# EAGLE board 7SegmentArduino (EAGLE 9.7.0)

Size 243.65 x 59.69 mm. Coordinates in mm from the lower left corner, seen from the top.
Outline: 0,0 243.65,0 243.65,59.69 0,59.69 0,0
Copper layers (1*16): Top 0.035mm / dielectric 1.5mm / Bottom 0.035mm
Design rules "default": minimum track width 6mil, minimum drill 0.35mm, track to track 6mil, track to pad 6mil, pad to pad 6mil, via to via 6mil, smd to smd 6mil, copper to edge 40mil, drill to drill 6mil, minimum pad ring 10mil, minimum via ring 8mil, stop-mask expansion 4mil, vias tented up to drill 0mil, thermal gap 10mil

## Footprints (pad centres in the part's own frame; a part is rotated, then mirrored left to right if it is on the bottom)
7SEG-13 = drill 0.813 long: 1 -5.08,-7.62; 2 -2.54,-7.62; 3 0,-7.62; 4 2.54,-7.62; 5 5.08,-7.62; 6 5.08,7.62; 7 2.54,7.62; 8 0,7.62; 9 -2.54,7.62; 10 -5.08,7.62
RESAD1016W63L850D250B = drill 0.83 pad 1.43: 1 -5.08,0; 2 5.08,0
SWITCH-MOMENTARY-PTH-6.5MM = drill 1.016 pad 1.88: 1 -3.251,2.261; 2 3.251,2.261; 3 -3.251,-2.261; 4 3.251,-2.261
DIP762W53P254L1969H508Q16B = drill 0.743 pad 1.343: 1 -3.81,8.89; 2 -3.81,6.35; 3 -3.81,3.81; 4 -3.81,1.27; 5 -3.81,-1.27; 6 -3.81,-3.81; 7 -3.81,-6.35; 8 -3.81,-8.89; 9 3.81,-8.89; 10 3.81,-6.35; 11 3.81,-3.81; 12 3.81,-1.27; 13 3.81,1.27; 14 3.81,3.81; 15 3.81,6.35; 16 3.81,8.89
ARDUINO-UNO-R3-SHIELD = drill 1.016 pad 1.88: 3.3V 24.13,-2.54; 5V 24.13,0; A0 24.13,12.7; A1 24.13,15.24; A2 24.13,17.78; A3 24.13,20.32; A4 24.13,22.86; A5 24.13,25.4; AREF -24.13,-13.97; D2 -24.13,20.32; D3 -24.13,17.78; D4 -24.13,15.24; D5 -24.13,12.7; D6 -24.13,10.16; D7 -24.13,7.62; D8 -24.13,3.81; D9 -24.13,1.27; D10 -24.13,-1.27; D11 -24.13,-3.81; D12 -24.13,-6.35; D13 -24.13,-8.89; GND@0 24.13,2.54; GND@1 24.13,5.08; GND@2 -24.13,-11.43; IOREF 24.13,-7.62; NC 24.13,-10.16; RES 24.13,-5.08; RX -24.13,25.4; SCL -24.13,-19.05; SDA -24.13,-16.51; TX -24.13,22.86; VIN 24.13,7.62

## Placement (x,y rotation side)
DIGIT1  7SEG-CK  [7SEG-13]  234.38,31.08 0 top
R1  10k  [RESAD1016W63L850D250B]  125.16,13.3 90 top
R2  270  [RESAD1016W63L850D250B]  178.5,28.54 90 top
R3  270  [RESAD1016W63L850D250B]  181.04,28.54 90 top
R4  270  [RESAD1016W63L850D250B]  183.58,28.54 90 top
R5  270  [RESAD1016W63L850D250B]  186.12,28.54 90 top
R6  270  [RESAD1016W63L850D250B]  188.66,28.54 90 top
R7  270  [RESAD1016W63L850D250B]  191.2,28.54 90 top
R8  270  [RESAD1016W63L850D250B]  193.74,28.54 90 top
R10  10k  [RESAD1016W63L850D250B]  109.92,13.3 90 top
S1  SWITCH_MOMENTARY  [SWITCH-MOMENTARY-PTH-6.5MM]  127.7,29.81 90 top
S2  SWITCH_MOMENTARY  [SWITCH-MOMENTARY-PTH-6.5MM]  115,29.81 90 top
U1  CD4511_PDIP  [DIP762W53P254L1969H508Q16B]  159.45,29.81 90 top
U2  ARDUINO-UNO-R3-SHIELD  [ARDUINO-UNO-R3-SHIELD]  47.88,29.84 270 top

## Library data of the parts
DIGIT1 = Tinkercad; CATEGORY: Opto-Electronic; SUB-CATEGORY: Display; TYPE: 7-Segment
R1-R8 R10 S1 S2 U1 U2 = Tinkercad

## Nets
DIGIT1_A: DIGIT1.7 R4.1
DIGIT1_B: DIGIT1.6 R5.1
DIGIT1_C: DIGIT1.4 R6.1
DIGIT1_D: DIGIT1.2 R7.1
DIGIT1_E: DIGIT1.1 R8.1
DIGIT1_F: DIGIT1.9 R2.1
DIGIT1_G: DIGIT1.10 R3.1
U1_A: R4.2 U1.13
U1_B: R5.2 U1.12
U1_C: R6.2 U1.11
U1_D: R7.2 U1.10
U1_E: R8.2 U1.9
U1_F: R2.2 U1.15
U1_G: R3.2 U1.14
U2_5V: S1.3 S1.4 S2.3 S2.4 U1.3 U1.4 U1.16 U2.5V
U2_D2: R1.2 S1.1 S1.2 U2.D2
U2_D3: R10.2 S2.1 S2.2 U2.D3
U2_D7: U1.7 U2.D7
U2_D8: U1.1 U2.D8
U2_D9: U1.2 U2.D9
U2_D10: U1.6 U2.D10
U2_GND: DIGIT1.3 DIGIT1.8 R1.1 R10.1 U1.5 U1.8 U2.GND@0 U2.GND@1 U2.GND@2

## Tracks (layer width: path | path; a pad name or v marks a point on that pad's centre or on a via)
DIGIT1_A  (1 unrouted)
DIGIT1_B  (1 unrouted)
DIGIT1_C  (1 unrouted)
DIGIT1_D  (1 unrouted)
DIGIT1_E  (1 unrouted)
DIGIT1_F  (1 unrouted)
DIGIT1_G  (1 unrouted)
U1_A  (1 unrouted)
U1_B  (1 unrouted)
U1_C  (1 unrouted)
U1_D  (1 unrouted)
U1_E  (1 unrouted)
U1_F  (1 unrouted)
U1_G  (1 unrouted)
U2_5V  (7 unrouted)
U2_D2  (3 unrouted)
U2_D3  (3 unrouted)
U2_D7  (1 unrouted)
U2_D8  (1 unrouted)
U2_D9  (1 unrouted)
U2_D10  (1 unrouted)
U2_GND  (8 unrouted)